# Altium PCB soldering.PcbDoc
Units mm, origin at the board's own origin, x right, y up, seen from the top; angles counter-clockwise.
Board outline 116 x 45 mm, 2 copper layers (Top Layer, Bottom Layer), stack 1.571 mm thick; 60 components, 60 nets, 205 pads, 8 vias.
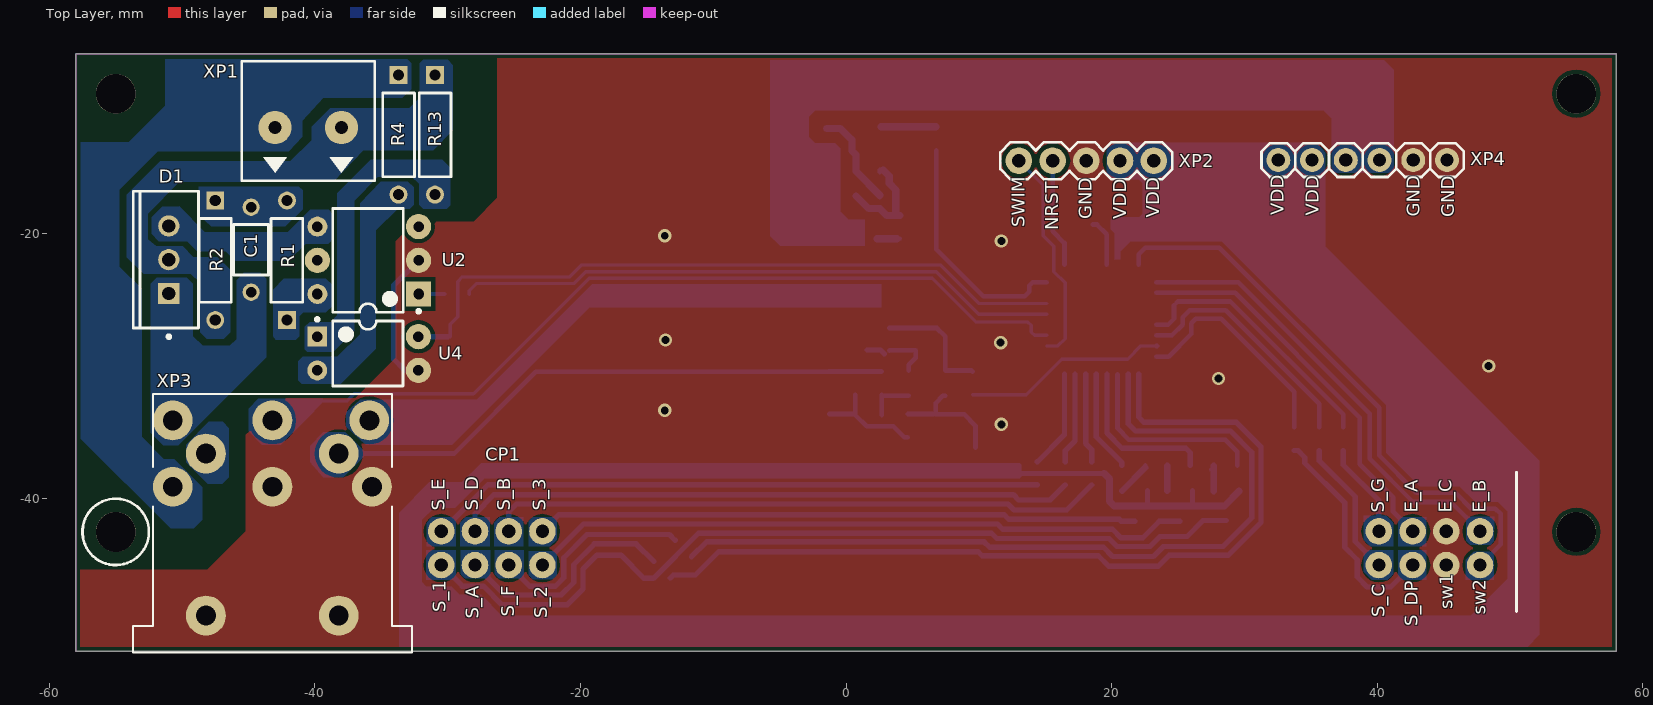
[diagram p0: Top Layer view]
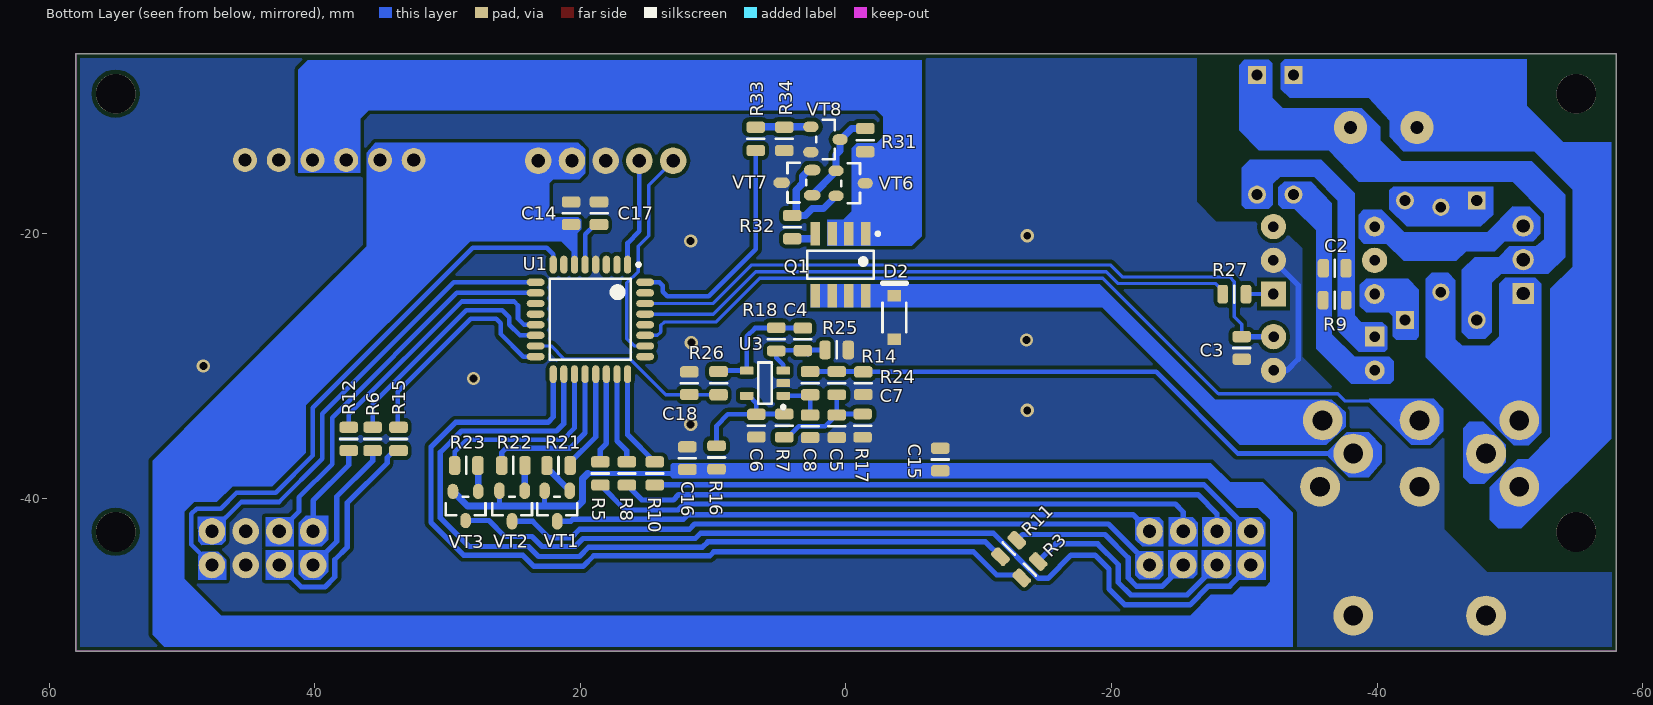
[diagram p1: Bottom Layer view, seen from below]

## Layer stack, top to bottom
Top Solder: solder mask 0.0102, Solder Resist, Dk 3.5
Top Layer: signal copper 0.0356
Dielectric1: core 1.5, FR-4, Dk 4.8
Bottom Layer: signal copper 0.0356
Bottom Solder: solder mask 0.0102, Solder Resist, Dk 3.5

## Board outline
-58,-51.5 -58,-6.5 58,-6.5 58,-51.5

## Design rules (kind name [scope] priority, off if disabled: settings)
Clearance Clearance_3 [IsRegion] p1: gap=0.3 ignorepadtopadclearanceinfootprint=FALSE except(0: Arc-Hole Track-Hole SMDPad-Hole THPad-Hole Via-Hole Fill-Hole Poly-Hole Region-Hole Text-Hole)
Clearance [All] p2: gap=0.25 ignorepadtopadclearanceinfootprint=FALSE
Clearance Clearance_2 [IsPad vs IsPad] p3: gap=0.2 ignorepadtopadclearanceinfootprint=FALSE except(0: Arc-Hole Track-Hole SMDPad-Hole THPad-Hole Via-Hole Fill-Hole Poly-Hole Region-Hole Text-Hole)
Clearance Clearance_1 [IsTrack vs IsTrack] p4: gap=0.2 ignorepadtopadclearanceinfootprint=FALSE except(0: Arc-Hole Track-Hole SMDPad-Hole THPad-Hole Via-Hole Fill-Hole Poly-Hole Region-Hole Text-Hole)
ComponentClearance [All] p1: gap=0.2 collisioncheckmode=3 verticalgap=0.2 showdistances=FALSE
HoleSize [All] p1: absolutevalues=TRUE maxlimit=40 minlimit=0.025 maxpercent=80.000 minpercent=20.000
MinimumSolderMaskSliver [All] p1: minsoldermaskwidth=0.15
PolygonConnect [All] p1: connectstyle=Direct reliefconductorwidth=0.254 reliefentries=4 polygonreliefangle="90 Angle" airgapwidth=0.254
RoutingVias [All] p1: holewidth=0.5 width=1.5 viastyle="Through Hole" minholewidth=0.2 minwidth=1 maxholewidth=2 maxwidth=3
SilkToSilkClearance [All] p1: silktosilkclearance=0.15
SilkToSolderMaskClearance SilkscreenOverComponentPads [IsPad] p1: minsilkscreentomaskgap=0.15 clearancetoexposedcopper=TRUE
SolderMaskExpansion [All] p1: expansion=0.102
Width [All] p1: maxlimit=3 minlimit=0.2 preferedwidth=1
25 further rules are at their usual default settings.

## Components (designator, comment, footprint, x,y, rotation, side; value= is the part's Value field where it differs from the comment)
C1 "A104M15X7RF5TAA" CAPA55-380X260 -44.8,-21.25 r90 top
C2 "10nF" CAP0805R -36.8,-22.65 r180 bottom
C3 "10nF" CAP0805R -29.8,-28.65 r90 bottom
C4 "10nF" CAP0805R 3.25,-28 r270 bottom
C5 "100nF" CAP0805R 0.7,-34.55 r90 bottom
C6 "100nF" CAP0805R 6.75,-34.5 r90 bottom
C7 "100nF" CAP0805R -1.3,-31.3 r90 bottom
C8 "100nF" CAP0805R 2.7,-34.55 r90 bottom
C14 "10uF" CAP0805R 20.7,-18.5 r270 bottom
C15 "10uF" CAP0805R -7.1,-37.05 r270 bottom
C16 "10uF" CAP0805R 11.95,-36.95 r270 bottom
C17 "10uF" CAP0805R 18.6,-18.5 r270 bottom
C18 "100nF" CAP0805R 11.8,-31.3 r270 bottom
CP1 "CONTROL_PANEL" CONTROL_PANEL -30.48,-45 r0 top locked
D1 "BTB12-600CW3G" ONSC-TO-220-3-221A-07 -51,-22 r180 top
D2 "MBR0540" FAIR-SOD123-2_V -3.65,-26.35 r90 bottom
Q1 "IRF7404PBF" INF-SOIC-8_V 0.415,-22.39 r270 bottom
R1 "MFR-25FBF52-1K" RESA60-630X240 -42.1,-22.05 r90 top
R2 "MFR-25FBF52-1K" RESA60-630X240 -47.5,-22.05 r270 top
R3 "22" RES0805R#1 -13.85,-45.35 r135 bottom
R4 "MFR-25FBF52-1K" RESA60-630X240 -33.7,-12.6 r270 top
R5 "22" RES0805R#1 18.5,-38.1 r90 bottom
R6 "22" RES0805R#1 35.65,-35.5 r270 bottom
R7 "10k" RES0805R#2 4.65,-34.5 r90 bottom
R8 "22" RES0805R#1 16.5,-38.1 r90 bottom
R9 "4k7" RES0805R#2 -36.8,-25.05 r180 bottom
R10 "22" RES0805R#1 14.4,-38.1 r90 bottom
R11 "22" RES0805R#1 -12.25,-43.75 r135 bottom
R12 "22" RES0805R#1 37.45,-35.5 r90 bottom
R13 "MFR-25FBF52-1K" RESA60-630X240 -30.95,-12.6 r270 top
R14 "1M" RES0805R#2 0.7,-31.3 r270 bottom
R15 "22" RES0805R#1 33.7,-35.5 r270 bottom
R16 "10" RES0805R#2 9.75,-36.9 r270 bottom
R17 "68" RES0805R#2 -1.25,-34.5 r90 bottom
R18 "100k" RES0805R#2 5.25,-28 r90 bottom
R21 "22" RES0805R#1 21.65,-37.5 r0 bottom
R22 "22" RES0805R#1 25.05,-37.5 r180 bottom
R23 "22" RES0805R#1 28.6,-37.5 r180 bottom
R24 "1k" RES0805R#1 2.7,-31.3 r270 bottom
R25 "1k" RES0805R#1 0.7,-28.8 r0 bottom
R26 "4k7" RES0805R#1 9.6,-31.3 r270 bottom
R27 "1k" RES0805R#2 -29.25,-24.6 r180 bottom
R31 "10k" RES0805R#1 -1.45,-13 r270 bottom
R32 "100" RES0805R#1 4.05,-19.55 r270 bottom
R33 "51" RES0805R#1 6.8,-12.9 r270 bottom
R34 "100k" RES0805R#1 4.65,-12.9 r90 bottom
U1 "STM8S103K3T6CTR" STM-LQFP32_L 19.25,-26.5 r270 bottom
U2 "MOC3063" LTST-DIP-6 -36,-22.05 r180 top
U3 "LMV321M5X" DBV0005A_N 6.1,-31.3 r0 bottom
U4 "VO617A-3" VISH-DIP-4 -36.01,-29.07 r0 top
VT1 "IRLML6402" SOT23#1 21.75,-40.55 r0 bottom
VT2 "IRLML6402" SOT23#1 25.15,-40.55 r0 bottom
VT3 "IRLML6402" SOT23#2 28.65,-40.55 r270 bottom
VT6 "BC847C" SOT23#2 -0.35,-16.25 r180 bottom
VT7 "BC857B" SOT23#1 3.7,-16.2 r90 bottom
VT8 "BC847C" SOT23#2 1.55,-12.95 r180 bottom
XP1 "306-021-12" 306-021-12 -40.5,-12.05 r0 top
XP2 "PLS" PLS-05 18.1,-14.55 r0 top
XP3 "KDJ01-8" KDJ01-8 -43.2,-51.6 r180 top
XP4 "PLS" PLS-06 45.26,-14.5 r180 top

## Footprints (in the part's own frame and the unit in brackets; to place one, negate y for a bottom-side part, rotate by r counter-clockwise, add the part's x,y. Pads: shape width x height; smd on the part's side, far side on the other; paste and mask are expansions set on the pad)
306-021-12 [mm]
  round 2.5 hole 1 unplated: 1(-2.5,0) 2(2.5,0)
  silkscreen extent -5,-4 5,5, body extent -5,-4 5,5, height 12.62
CAP0805R [mm] "capacitor 0805 reflow soldering"
  rrect50% 0.85x1.4 smd: 1(-0.85,0) 2(0.85,0)
  silkscreen extent 0,-0.64 0,0.64, body extent -1,-0.62 1,0.63, height 0.61
CAPA55-380X260 [mm] "THD, 2-Leads, Dia 2.6mm, Body Length 3.8mm"
  round 1.3 hole 0.8: 1(-3.2,0) 2(3.2,0)
  silkscreen extent -1.9,-1.3 1.9,1.3, body extent -1.9,-1.3 1.9,1.3, height 2.6
CONTROL_PANEL [mm]
  round 2 hole 1: 1(0,0) 2(0,2.54) 3(2.54,0) 4(2.54,2.54) 5(5.08,0) 6(5.08,2.54) 7(7.62,0) 8(7.62,2.54) 9(70.612,0) 10(70.612,2.54) 11(73.152,0) 12(73.152,2.54) 13(75.692,0) 14(75.692,2.54) 15(78.232,0) 16(78.232,2.54)
  body extent -1.4,-20.7 79.63,7.8, height 19.06
DBV0005A_N [mm] "SOT23, 5-Leads, Body 3.05x1.75mm, Pitch 0.95mm, IPC Medium Density"
  rrect17% 1x0.6 smd: 1(-1.375,0.95) 2(-1.375,0) 3(-1.375,-0.95) 4(1.375,-0.95) 5(1.375,0.95)
  silkscreen extent -1.5,-1.55 0.5,1.92, body extent -1.42,-1.46 1.42,1.46, height 1.08
FAIR-SOD123-2_V [mm] "SOD123, 2-Leads, Body 1.80x2.85mm"
  rect 0.88x1.02 smd: 1(-1.635,0) 2(1.635,0)
  silkscreen extent -1.11,-0.9 2.58,0.9, body extent -1.43,-0.9 1.42,0.9, height 1.28
INF-SOIC-8_V [mm] "SOIC, 8-Leads, Body 5x4mm, Pitch 1.27mm"
  rect 1.78x0.72 smd: 1(-2.34,1.905) 2(-2.34,0.635) 3(-2.34,-0.635) 4(-2.34,-1.905) 5(2.34,-1.905) 6(2.34,-0.635) 7(2.34,0.635) 8(2.34,1.905)
  silkscreen extent -2.46,-2.5 1.05,2.94, body extent -3,-2.5 3,2.5, height 1.75
KDJ01-8 [mm]
  round 3 hole 1.5: 1(-7.3,-17.5) 2(-7.5,-12.5) 3(-5,-15) 4(0,-12.5) 5(5,-15) 6(7.5,-12.5) 7(7.5,-17.5) 8(0,-17.5) 9(-5,-2.8) 10(5,-2.8)
  silkscreen extent -10.5,-19.5 10.5,0, body extent -10.5,-19.5 10.5,0, height 19.51
LTST-DIP-6 [mm] "DIP, 6-Leads, Body 7.8x7mm, Pitch 2.54mm"
  rect 1.9x1.9 hole 0.8: 1(-3.81,2.54)
  round 1.9 hole 0.8: 2(-3.81,0) 3(-3.81,-2.54) 5(3.81,0)
  round 1.5 hole 0.8: 4(3.81,-2.54) 6(3.81,2.54)
  silkscreen extent -3.94,-3.9 2.65,3.96, body extent -3.95,-3.9 3.95,3.9, height 5.37
ONSC-TO-220-3-221A-07 [mm] "FM, 3-Leads, Body 10.3x4.85mm, Pitch 2.54mm"
  rect 1.6x1.6 hole 1: 1(0,2.54)
  round 1.6 hole 1: 2(0,0) 3(0,-2.54)
  silkscreen extent -2.23,-5.15 2.67,5.92, body extent -2.21,-5.15 2.64,5.15, height 19.68
PLS-05 [mm]
  round 2 hole 1: 1(-5.08,0) 2(-2.54,0) 3(0,0) 4(2.54,0) 5(5.08,0)
  silkscreen extent -6.48,-1.4 6.48,1.4, body extent -6.35,-1.27 6.35,1.27, height 8.45
PLS-06 [mm]
  round 1.8 hole 1: 1(0,0) 2(2.54,0) 3(5.08,0) 4(7.62,0) 5(10.16,0) 6(12.7,0)
  silkscreen extent -1.27,-1.27 13.97,1.27, body extent -1.27,-1.27 13.97,1.27, height 8.45
RES0805R#1 [mm] "resistor 0805 reflow soldering"
  rrect50% 0.85x1.4 smd: 1(-0.875,0) 2(0.875,0)
  silkscreen extent 0,-0.64 0,0.64, body extent -1,-0.62 1,0.63, height 0.61
RES0805R#2 [mm] "resistor 0805 reflow soldering"
  rrect50% 0.8x1.4 smd: 1(-0.875,0) 2(0.875,0)
  silkscreen extent 0,-0.63 0,0.64, body extent -1,-0.62 1,0.63, height 0.61
RESA60-630X240 [mm] "Axial Resistor, 2-Leads, Dia 2.4mm, Body Length 6.3mm"
  rect 1.35x1.35 hole 0.85: 1(-4.5,0)
  round 1.35 hole 0.85: 2(4.5,0)
  silkscreen extent -3.15,-1.2 3.15,1.2, body extent -3.15,-1.2 3.15,1.2, height 2.4
SOT23#1 [mm]
  oval 0.8x1.25 smd mask+0.1: 1(-0.95,-1.15) 2(0.95,-1.15) 3(0,1.15)
  silkscreen extent -1.5,-0.7 1.5,0.7, body extent -1.46,-1.16 1.46,1.18, height 1
SOT23#2 [mm]
  oval 1.15x0.8 smd mask+0.1: 1(-1.1,0.95) 2(-1.1,-0.95) 3(1.1,0)
  silkscreen extent -0.7,-1.5 0.7,1.5, body extent -1.16,-1.46 1.18,1.46, height 1
STM-LQFP32_L [mm] "QFP, 32-Leads, Body 7x7mm, Pitch 0.8mm, IPC High Density"
  oval 1.35x0.55 smd: 1(-4.125,2.8) 2(-4.125,2) 3(-4.125,1.2) 4(-4.125,0.4) 5(-4.125,-0.4) 6(-4.125,-1.2) 7(-4.125,-2) 8(-4.125,-2.8) 17(4.125,-2.8) 18(4.125,-2) 19(4.125,-1.2) 20(4.125,-0.4) 21(4.125,0.4) 22(4.125,1.2) 23(4.125,2) 24(4.125,2.8)
  oval 0.55x1.35 smd: 9(-2.8,-4.125) 10(-2,-4.125) 11(-1.2,-4.125) 12(-0.4,-4.125) 13(0.4,-4.125) 14(1.2,-4.125) 15(2,-4.125) 16(2.8,-4.125) 25(2.8,4.125) 26(2,4.125) 27(1.2,4.125) 28(0.4,4.125) 29(-0.4,4.125) 30(-1.2,4.125) 31(-2,4.125) 32(-2.8,4.125)
  silkscreen extent -4.25,-3.05 3.05,3.75, body extent -3.5,-3.5 3.5,3.5, height 1.6
VISH-DIP-4 [mm] "DIP, 4-Leads, Body 7x4.9mm, Pitch 2.54mm"
  rect 1.5x1.5 hole 0.8: 1(-3.81,1.27)
  round 1.5 hole 0.8: 2(-3.81,-1.27)
  round 1.9 hole 0.8: 3(3.81,-1.27) 4(3.81,1.27)
  silkscreen extent -3.93,-2.45 2.65,2.69, body extent -3.95,-2.45 3.95,2.45, height 5.27

## Part data
C1: library part CMP-2000-05716-1, "Axial Leaded Multilayer Ceramic Capacitor for General Purpose, 50 VDC, 100 nF, +/- 20%, -55 to 125 degC, 2-Pin THD, RoHS, Tape and Reel", Capacitance=0.1µF, Manufacturer=Vishay, Operating Temperature=-55°C~125°C, Package / Case=Axial, Package Description="2-Pin Axial Lead, Dia 2.6 mm, Body Length 3.8 mm", Package Reference=CAPA55-380X260, Ratings=-, Standard Package=7,000, Temperature Coefficient=X7R, Tolerance=±20%, Voltage - Rated=50V, Applications=GeneralPurpose, Category=Capacitors, Datasheet URL=http://www.vishay.com/docs/45164/aseries.pdf, Datasheet Version=08/2013, Family=CeramicCapacitors, Features=-, Height - Seated (Max)=-, Lead Spacing=-, Lead Style=-, Manufacturer URL=http://www.vishay.com/, Mounting Technology=ThroughHole, Mounting Type=ThroughHole, Packaging=Tape&Reel(TR), Series=A, Size / Dimension="0.098\"Diax0.150\"L(2.50mmx3.80mm)", Thickness (Max)=-
C2 C3 C4: library part CC0805_10NF_250V_10%_X7R, Case=0805, Manufacturer=GENERIC, Manufacturer1 ComponentHeight=0.88mm, Manufacturer1 Example=KEMET, Manufacturer1 Part Number=C0805C103KARACTU, Manufacturer Part Number 2=CC0805KKX7RYBB103, Tolerance=±10%, Voltage=250V, Author="I. Kuznetsov", Component Type=Standard, CreateDate=6/24/2013, HelpURL=\\cern.ch\dfs\Applications\Altium\Datasheets\CC0805_X7R_KEMET.pdf, LatestRevisionDate=6/24/2013, Manufacturer Part Number=CC0805_10NF_250V_10%_X7R, Mounted=Yes, Part Description="SMD Multilayer Chip Ceramic Capacitor", Part Number=CC0805_10NF_250V_10%_X7R, Pin Count=2, SMD=Yes, Socket=No, Status=None, Table="Capacitors SMD", TC=X7R
C5 C6 C7 C8 C18: library part CC0805_100NF_50V_10%_X7R, "SMD 0805 Capacitor", Case=0805, Manufacturer=GENERIC, Manufacturer1 ComponentHeight=1.35mm, Manufacturer1 Example=EPCOS, Manufacturer1 Part Number=B37941K5104K62, Tolerance=±10%, Voltage=50V, Author="I. Kuznetsov", Component Type=Standard, CreateDate=03.12.2007, HelpURL=\\cern.ch\dfs\Applications\Altium\Datasheets\CC0805_X7R_EPCOS.pdf, LatestRevisionDate=03.12.2007, Manufacturer Part Number=CC0805_100NF_50V_10%_X7R, Mounted=Yes, Part Description="SMD Multilayer Chip Ceramic Capacitor", Part Number=CC0805_100NF_50V_10%_X7R, Pin Count=2, SMD=Yes, Socket=No, Status=Preferred, Table="Capacitors SMD", TC=X7R
C14 C15 C16 C17: library part CC0805_10UF_10V_10%_X7R, "SMD 0805 Capacitor", Case=0805, Manufacturer=GENERIC, Manufacturer1 ComponentHeight=1.35mm, Manufacturer1 Example=MURATA, Manufacturer1 Part Number=GRM21BR71A106KE51L, Tolerance=±10%, Voltage=10V, Author="I. Kuznetsov", Component Type=Standard, CreateDate=30.04.2012, HelpURL=\\cern.ch\dfs\Applications\Altium\Datasheets\CC0805_X7R_MURATA.pdf, LatestRevisionDate=30.04.2012, Manufacturer Part Number=CC0805_10UF_10V_10%_X7R, Mounted=Yes, Part Description="SMD Multilayer Chip Ceramic Capacitor", Part Number=CC0805_10UF_10V_10%_X7R, Pin Count=2, SMD=Yes, Socket=No, Status=Preferred, Table="Capacitors SMD", TC=X7R
D1: library part CMP-1070-00036-1, "Triacs, Silicon Bidirectional Thyristor, 3-Pin TO-220, Pb-Free, Tube", Manufacturer="On Semiconductor", ComponentLink1Description="Manufacturer URL", ComponentLink1URL=http://www.onsemi.com/, ComponentLink2Description=Datasheet, ComponentLink2URL=http://www.onsemi.com/pub_link/Collateral/BTB12-600CW3-D.PDF, ComponentLink3Description="Package Specification", ComponentLink3URL=http://www.onsemi.com/pub_link/Collateral/221A-07.PDF, DatasheetVersion="Rev. 1", IGT Max (mA)=35, IT(RMS) Max (A)=12, ITSM Max (A)=120, Mounting Technology="Through Hole", PackageDescription="3-Pin Flange Mount, Vertical Straight Lead, Body 9.97 x 4.445 mm, Pitch 2.54 mm", PackageReference=TO-220-3-221A-07, PackageVersion="Rev. O, 07/2008", Packing=Tube, PartNumber=BTB12-600CW3G, RoHS=Pb-Free
D2: library part CMP-2000-05114-1, "Schottky Rectifier, 40 V, 0.5 A, 2-Pin SOD-123, RoHS, Tape and Reel", Capacitance @ Vr, F=-, Current - Average Rectified (Io)=500mA, Current - Reverse Leakage @ Vr=20µA@40V, Manufacturer=Fairchild, Operating Temperature - Junction=-65degC~125degC, Package / Case=SOD-123, Standard Package=1, Voltage - DC Reverse (Vr) (Max)=40V, Voltage - Forward (Vf) (Max) @ If=510mV@500mA, Category=DiscreteSemiconductorProducts, Datasheet URL=https://datasheet.ciiva.com/8303/mbr0540-8303808.pdf, Datasheet Version="Rev. 1.1.0, 10/2014", Diode Type=Schottky, Family=Diodes,Rectifiers-Single, Manufacturer URL=https://www.fairchildsemi.com/, Mounting Type=SurfaceMount, Online Catalog=SchottkyDiode, Other Names=MBR0540CT, Packaging=CutTape(CT), Reverse Recovery Time (trr)=-, Series=-, Speed=FastRecovery=200mA(Io), Supplier Device Package=SOD-123
Q1: library part CMP-2000-06465-1, "HEXFET(R) Power MOSFET, 6.7 A, 20 V, 8-Pin SOIC, RoHS, Tape and Reel", Current - Continuous Drain (Id) @ 25°C=6.7A(Ta), Drain to Source Voltage (Vdss)=20V, Input Capacitance (Ciss) @ Vds=1500pF@15V, Manufacturer=InfineonTechnologies, Operating Temperature=-55°C~150°C(TJ), Package / Case="8-SOIC(0.154\",3.90mmWidth)", Package Description="8-Pin Small Outline Integrated Circuit, Body 4.9 x 3.9 mm, Pitch 1.27 mm", Package Reference=SOIC-8, Power - Max=2.5W, Supplier Device Package=8-SO, Category=DiscreteSemiconductorProducts, Datasheet URL=http://www.infineon.com/dgdl/irf7404pbf.pdf?fileId=5546d462533600a4015355fa31be1ba0, Datasheet Version=09/2004, Family=Transistors-FETs,MOSFETs-Single, FET Feature=Standard, FET Type=MOSFETP-Channel,MetalOxide, Gate Charge (Qg) @ Vgs=50nC@4.5V, Manufacturer URL=http://www.infineon.com/, Mounting Technology=SurfaceMount, Mounting Type=SurfaceMount, Packaging=Tube, Part Status=NotForNewDesigns, Rds On (Max) @ Id, Vgs=40mOhm@3.2A,4.5V, Series=HEXFET®, Vgs(th) (Max) @ Id=700mV@250µA
R1 R2 R4 R13: library part CMP-1659-00075-1, "Axial Resistor, 1 KOhm, +/- 1%, 250 mW, -55 to 155 degC, 2-Pin THD, RoHS, Bulk", Case\Package=Axial, Max Operating Temperature="155 degC", Min Operating Temperature="-55 degC", Package Quantity=200, Power Rating="250 mW", Resistance="10 kohm", Tolerance=1%, Voltage Rating="250 V", ComponentLink1Description="Manufacturer URL", ComponentLink1URL=http://www.yageo.com/, ComponentLink2Description=Datasheet, ComponentLink2URL=http://www.yageo.com/documents/recent/Yageo%20LR_MFR_2013.pdf, DatasheetVersion=Apr-13, Length="0.248 inch", PackageDescription="2-Pin Axial Lead, Dia 2.4 mm, Body Length 6.3 mm", PackageReference=MFR-25, Packaging=Bulk, RoHSCompliant=true
R3 R5 R6 R8 R10 R11 R12 R15 R21 R22 R23: library part R0805_22R_1%_0.125W_100PPM, Case=0805, Manufacturer=GENERIC, Manufacturer1 ComponentHeight=0.6mm, Manufacturer1 Example="NIC COMPONENT", Manufacturer1 Part Number=NRC10F22R0TRF, Power=0.125W, Tolerance=±1%, Author="CERN DEM JLC", Component Type=Standard, CreateDate=03.12.2007, HelpURL=\\cern.ch\dfs\Applications\Altium\Datasheets\R0805_NIC_NRC.pdf, LatestRevisionDate=13.03.2008, Manufacturer Part Number=R0805_22R_1%_0.125W_100PPM, Mounted=Yes, Part Description="General Purpose Thick Film Chip Resistor", Part Number=R0805_22R_1%_0.125W_100PPM, Pin Count=2, SMD=Yes, Socket=No, Status=Preferred, Table="Resistors SMD", TC=±100ppm/°C
R7 R31: library part R0805_10K_1%_0.125W_100PPM, Case=0805, Manufacturer=GENERIC, Manufacturer1 ComponentHeight=0.6mm, Manufacturer1 Example="NIC COMPONENT", Manufacturer1 Part Number=NRC10F1002TRF, Power=0.125W, Tolerance=±1%, Author="CERN DEM JLC", Component Type=Standard, HelpURL=\\cern.ch\dfs\Applications\Altium\Datasheets\R0805_NIC_NRC.pdf, Manufacturer Part Number=R0805_10K_1%_0.125W_100PPM, Mounted=Yes, Part Description="General Purpose Thick Film Chip Resistor", Part Number=R0805_10K_1%_0.125W_100PPM, Pin Count=2, SMD=Yes, Socket=No, Status=Preferred, Table="Resistors SMD", TC=±100ppm/°C
  R7: CreateDate=12/3/2007, LatestRevisionDate=3/13/2008, PackageDescription=Standard
  R31: CreateDate=03.12.2007, LatestRevisionDate=13.03.2008
R9 R26: library part R0805_4K7_1%_0.125W_100PPM, Case=0805, Manufacturer=GENERIC, Manufacturer1 ComponentHeight=0.6mm, Manufacturer1 Example="NIC COMPONENT", Manufacturer1 Part Number=NRC10F4701TRF, Power=0.125W, Tolerance=±1%, Author="CERN DEM JLC", Component Type=Standard, CreateDate=12/3/2007, HelpURL=\\cern.ch\dfs\Applications\Altium\Datasheets\R0805_NIC_NRC.pdf, LatestRevisionDate=3/13/2008, Manufacturer Part Number=R0805_4K7_1%_0.125W_100PPM, Mounted=Yes, PackageDescription=Standard, Part Description="General Purpose Thick Film Chip Resistor", Part Number=R0805_4K7_1%_0.125W_100PPM, Pin Count=2, SMD=Yes, Socket=No, Status=Preferred, Table="Resistors SMD", TC=±100ppm/°C
R14: library part R0805_1M_1%_0.125W_100PPM, Case=0805, Manufacturer=GENERIC, Manufacturer1 ComponentHeight=0.6mm, Manufacturer1 Example="NIC COMPONENT", Manufacturer1 Part Number=NRC10F1004TRF, Power=0.125W, Tolerance=±1%, Author="CERN DEM JLC", Component Type=Standard, CreateDate=12/3/2007, HelpURL=\\cern.ch\dfs\Applications\Altium\Datasheets\R0805_NIC_NRC.pdf, LatestRevisionDate=3/13/2008, Manufacturer Part Number=R0805_1M_1%_0.125W_100PPM, Mounted=Yes, PackageDescription=Standard, Part Description="General Purpose Thick Film Chip Resistor", Part Number=R0805_1M_1%_0.125W_100PPM, Pin Count=2, SMD=Yes, Socket=No, Status=Preferred, Table="Resistors SMD", TC=±100ppm/°C
R16: library part R0805_10R_1%_0.125W_200PPM, Case=0805, Manufacturer=GENERIC, Manufacturer1 ComponentHeight=0.6mm, Manufacturer1 Example="NIC COMPONENT", Manufacturer1 Part Number=NRC10F10R0TRF, Power=0.125W, Tolerance=±1%, Author="CERN DEM JLC", Component Type=Standard, CreateDate=12/3/2007, HelpURL=\\cern.ch\dfs\Applications\Altium\Datasheets\R0805_NIC_NRC.pdf, LatestRevisionDate=6/24/2009, Manufacturer Part Number=R0805_10R_1%_0.125W_200PPM, Mounted=Yes, PackageDescription=Standard, Part Description="General Purpose Thick Film Chip Resistor", Part Number=R0805_10R_1%_0.125W_200PPM, Pin Count=2, SMD=Yes, Socket=No, Status=Preferred, Table="Resistors SMD", TC=±200ppm/°C
R17: library part R0805_68R_1%_0.125W_100PPM, Case=0805, Manufacturer=GENERIC, Manufacturer1 ComponentHeight=0.6mm, Manufacturer1 Example="NIC COMPONENT", Manufacturer1 Part Number=NRC10F68R0TRF, Power=0.125W, Tolerance=±1%, Author="CERN DEM JLC", Component Type=Standard, CreateDate=12/3/2007, HelpURL=\\cern.ch\dfs\Applications\Altium\Datasheets\R0805_NIC_NRC.pdf, LatestRevisionDate=3/13/2008, Manufacturer Part Number=R0805_68R_1%_0.125W_100PPM, Mounted=Yes, PackageDescription=Standard, Part Description="General Purpose Thick Film Chip Resistor", Part Number=R0805_68R_1%_0.125W_100PPM, Pin Count=2, SMD=Yes, Socket=No, Status=Preferred, Table="Resistors SMD", TC=±100ppm/°C
R18 R34: library part R0805_100K_1%_0.125W_100PPM, Case=0805, Manufacturer=GENERIC, Manufacturer1 ComponentHeight=0.6mm, Manufacturer1 Example="NIC COMPONENT", Manufacturer1 Part Number=NRC10F1003TRF, Power=0.125W, Tolerance=±1%, Author="CERN DEM JLC", Component Type=Standard, HelpURL=\\cern.ch\dfs\Applications\Altium\Datasheets\R0805_NIC_NRC.pdf, Manufacturer Part Number=R0805_100K_1%_0.125W_100PPM, Mounted=Yes, Part Description="General Purpose Thick Film Chip Resistor", Part Number=R0805_100K_1%_0.125W_100PPM, Pin Count=2, SMD=Yes, Socket=No, Status=Preferred, Table="Resistors SMD", TC=±100ppm/°C
  R18: CreateDate=12/3/2007, LatestRevisionDate=3/13/2008, PackageDescription=Standard
  R34: CreateDate=03.12.2007, LatestRevisionDate=13.03.2008
R24 R25 R27: library part R0805_1K_1%_0.125W_100PPM, Case=0805, Manufacturer=GENERIC, Manufacturer1 ComponentHeight=0.6mm, Manufacturer1 Example="NIC COMPONENT", Manufacturer1 Part Number=NRC10F1001TRF, Power=0.125W, Tolerance=±1%, Author="CERN DEM JLC", Component Type=Standard, CreateDate=12/3/2007, HelpURL=\\cern.ch\dfs\Applications\Altium\Datasheets\R0805_NIC_NRC.pdf, LatestRevisionDate=3/13/2008, Manufacturer Part Number=R0805_1K_1%_0.125W_100PPM, Mounted=Yes, PackageDescription=Standard, Part Description="General Purpose Thick Film Chip Resistor", Part Number=R0805_1K_1%_0.125W_100PPM, Pin Count=2, SMD=Yes, Socket=No, Status=Preferred, Table="Resistors SMD", TC=±100ppm/°C
R32: library part R0805_100R_1%_0.125W_100PPM, Case=0805, Manufacturer=GENERIC, Manufacturer1 ComponentHeight=0.6mm, Manufacturer1 Example="NIC COMPONENT", Manufacturer1 Part Number=NRC10F4700TRF, Power=0.125W, Tolerance=±1%, Author="CERN DEM JLC", Component Type=Standard, CreateDate=03.12.2007, HelpURL=\\cern.ch\dfs\Applications\Altium\Datasheets\R0805_NIC_NRC.pdf, LatestRevisionDate=13.03.2008, Manufacturer Part Number=R0805_100R_1%_0.125W_100PPM, Mounted=Yes, Part Description="General Purpose Thick Film Chip Resistor", Part Number=R0805_100R_1%_0.125W_100PPM, Pin Count=2, SMD=Yes, Socket=No, Status=Preferred, Table="Resistors SMD", TC=±100ppm/°C
R33: library part R0805_51R_1%_0.125W_100PPM, Case=0805, Manufacturer=GENERIC, Manufacturer1 ComponentHeight=0.6mm, Manufacturer1 Example="NIC COMPONENT", Manufacturer1 Part Number=NRC10F51R0TRF, Power=0.125W, Tolerance=±1%, Author="CERN DEM JLC", Component Type=Standard, CreateDate=03.12.2007, HelpURL=\\cern.ch\dfs\Applications\Altium\Datasheets\R0805_NIC_NRC.pdf, LatestRevisionDate=13.03.2008, Manufacturer Part Number=R0805_51R_1%_0.125W_100PPM, Mounted=Yes, Part Description="General Purpose Thick Film Chip Resistor", Part Number=R0805_51R_1%_0.125W_100PPM, Pin Count=2, SMD=Yes, Socket=No, Status=Preferred, Table="Resistors SMD", TC=±100ppm/°C
U1: library part CMP-0947-00001-1, "STM8S 8-bit MCU, 8 kB Flash, 1 kB Internal RAM, -40 to 85 degC, 32-Pin LQFP, Tape and Reel", Manufacturer=STMicroelectronics, Operating Frequency="16 MHz", Supply Voltage="2.95 to 5.5 V", Temperature Range="-40 to 85 degC", ComponentLink1Description="Manufacturer URL", ComponentLink1URL=http://www.st.com/, ComponentLink2Description=Datasheet, ComponentLink2URL=http://www.st.com/st-web-ui/static/active/en/resource/technical/document/datasheet/CD00226640.pdf, Data E2PROM Nom="640 Bytes", DatasheetVersion="Rev. 9", Family Type=Standard, Internal RAM Size="1 KBytes", Mounting Technology="Surface Mount", PackageDescription="32-Pin Low Profile Quad Flat Package, Body 7 x 7 mm, Pitch 0.8 mm", PackageReference=LQFP-32, Packing="Tape and Reel", PartNumber=STM8S103K3T6CTR, Product Class=STM8, Program Memory Size="8 KBytes", Sub-family Type=103
U2: library part CMP-2000-06746-1, "Optocoupler Triac, 50 mA, -40 to 100 degC, 6-Pin DIP, RoHS, Tube", Current - DC Forward (If) (Max)=50mA, Current - Hold (Ih)=400µA(Typ), Current - LED Trigger (Ift) (Max)=5mA, Current - On State (It (RMS)) (Max)=-, Manufacturer=Lite-On-Inc., Operating Temperature=-40°C~100°C, Package / Case="6-DIP(0.300\",7.62mm)", Package Description="6-Pin Double In-line Package, Body 7.3 x 6.5 mm, Pitch 2.54 mm", Package Reference=DIP-6, Supplier Device Package=6-DIP, Voltage - Forward (Vf) (Typ)=1.2V, Voltage - Isolation=5000Vrms, Voltage - Off State=600V, Approvals=CSA,FIMKO,UL, Category=Isolators, Datasheet URL=http://optoelectronics.liteon.com/upload/download/DS70-2001-026/S_110_MOC3063%20SERIES.pdf, Datasheet Version="Rev. C, 04/2010", Family=Optoisolators-Triac,SCROutput, Manufacturer URL=http://www.us.liteon.com/, Mounting Technology=ThroughHole, Mounting Type=ThroughHole, Number of Channels=1, Output Type=Triac, Packaging=Tube, Series=-, Static dV/dt (Min)=1kV/µs, Turn On Time=-, Zero Crossing Circuit=Yes
U3: library part CMP-0055-01048-3, "General Purpose, Low Voltage, Rail-to-Rail Output Operational Amplifiers, 5-pin SOT-23", Manufacturer="Texas Instruments", Package Reference=DBV0005A, PackageTopMarking=A13*XTT, PowerWise=N, ComponentLink1Description="Datasheet URL", ComponentLink1URL=http://www.ti.com/general/docs/lit/getliterature.tsp?genericPartNumber=LMV321-N&fileType=pdf, CompType=Amplifiers, PackageDescription="Molded SOT-23, .115 x .063 x .040 in Body, 5 Lead, .0375 in Pitch", PinCount=5, RoHS=N
U4: library part CMP-2000-07400-1, "Optocoupler, Phototransistor Output, High Reliability, 5300 VRMS, -55 to 110 degC, 4-Pin DIP, RoHS, Tape and Reel", Manufacturer=Vishay/Semiconductor, Maximum Collector Current=50mA, Maximum Collector Emitter Saturation Voltage=400mV, Maximum Collector Emitter Voltage=80V, Maximum Current Transfer Ratio @ Current=200%, Maximum Forward Voltage=1.65V, Maximum Input Current=60mA, Maximum Power Dissipation=150mW, Maximum Reverse Voltage=6V, Minimum Forward Voltage=1V, Minimum Isolation Voltage=5000Vrms, Operating Temperature=-55to110°C, Package=4PDIP, Package Description="4-Pin Double In-line Package, Body 4.58 x 6.5 mm, Pitch 2.54 mm", Package Reference=DIP-4, Typical Forward Voltage=1.35V, Category=TransistorandPhotovoltaicOutputPhotoCouplers, Datasheet URL=http://www.vishay.com/docs/83430/vo617a.pdf, Datasheet Version="Rev. 2.5, 08/2015", Input Type=DC, Manufacturer URL=http://www.vishay.com/, Mounting Technology=ThroughHole, Number of Channels per Chip=1, Output Type=DC, Packaging=Tape&Reel, Rad Hard=No
VT1 VT2 VT3 VT6 VT7 VT8: Case=SOT23, Author="I. Kuznetsov", Component Type=Standard, Mounted=Yes, SMD=Yes, Socket=No, Status=Active, Table=Transistors
  VT1 VT2 VT3: Device=IRLML6402, Part Description="MOSFET P-êàíàë 20Â/3.7À/1.3Âò/0.065 Îì", Part Number=IRLML6402
  VT6 VT8: Device=BC847C, Part Description="NPN 45Â/0.1À Êóñ.=420-800", Part Number=BC847C
  VT7: Device=BC857B, Part Description="PNP 45Â/0.1À Êóñ.=200-450", Part Number=BC857B
XP2: library part PLS-05, Manufacturer=AUK, Component Type=Standard, Family=PLS, Manufacturer Part Number=PLS-05, PackageDescription=PLS-05, Part Number=PLS-05, Pin Count=5, SMD=Yes, Table=AUK
XP4: library part PLS-06, Manufacturer=AUK, ComponentLink1URL=http://lib.chipdip.ru/227/DOC000227157.pdf, Component Type=Standard, Device=PLS-06, Family=PLS, Manufacturer Part Number=PLS-06, PackageDescription=PLS-06, Part Number=PLS-06, Pin Count=6, SMD=Yes, Table=AUK
XP1: ComponentLink1URL=http://www.promelec.ru/pdf/305,306.pdf, Device=306-021-12, Family=DG306, Part Number=306-021-12, Table=DEGSON
XP3: Device=KDJ01-8, Part Number=KDJ01-8, Table=OTHER

## Free pads (board coordinates)
  round 3 hole 3 unplated: 1(-55,-42.5) 1(-55,-9.5) 1(55,-42.5) 1(55,-9.5)

## Via types
v1: diameter 1, hole 0.6, Top Layer to Bottom Layer, 8 vias

## Nets (pads, with @x,y where several pads share a name; then routed paths per layer and width w, separated by ;. In a path a pad name is that pad's centre, name@x,y a point inside that pad or via, vN(x,y) a via of type N, cw(c..) or ccw(c..) an arc to the next point about the centre after c; other vN are vias at no path point)
+24V: Q1.1 Q1.2 Q1.3 R31.2 VT6.3 XP4.3 XP4.4 | length 31.7
  Bottom Layer w0.5: -1.9,-8.7 29.75,-8.7
AC1: D1.2 R2.2 R13.1 XP1.2 | length 1.4
  Bottom Layer w0.6: -53.2,-21.35 -52.55,-22 ; R2.2@-47.5,-27 R2.2
AC2: R4.1 XP1.1 XP3.6
EARTH: XP3.5
ENC_A: CP1.12 U1.10 | length 29.4
  Bottom Layer w0.35: U1.10 29.3,-24.5 38.7,-33.9 38.7,-37.4 41.2,-39.9 41.2,-40.988 CP1.12
ENC_B: CP1.16 U1.9 | length 34.1
  Bottom Layer w0.35: U1.9 29.55,-23.7 39.45,-33.6 39.45,-37 42.7,-40.25 45.542,-40.25 CP1.16
FAN+: D2.2 Q1.5 Q1.6 Q1.7 Q1.8 XP3.1
FAN_PWM: R33.2 U1.32 | length 17.9
  Bottom Layer w0.35: R33.2 6.8,-21.2 10.35,-24.75 13.45,-24.75 13.8,-24.4 13.8,-23.95 14.05,-23.7 U1.32
GND: C3.1 C5.1 C6.1 C7.1 C8.1 C14.1 C15.1 C16.1 C17.1 C18.1 CP1.13 CP1.14 D2.1 R17.1 R25.1 R34.1 U1.4 U2.2 U3.2 U4.3 VT7.3 VT8.2 XP2.3 XP3.2 XP3.4 XP3.9 XP3.10 XP4.1 XP4.2 | length 10.4
  Bottom Layer w0.4: U4.3 -33.21,-30.34 -34.05,-29.5 -34.05,-23.91 U2.2
  other v1: 11.7,-34.4 -13.65,-33.35 28.05,-30.95 48.4,-30 11.65,-28.25 -13.6,-28.05 11.7,-20.6 -13.65,-20.2
HTR1: C1.1 D1.1 XP3.7 | length 0.4
  Bottom Layer w0.6: -51,-26.65 -50.7,-26.95
NetC1_2: C1.2 R1.2 R2.1
NetC2_1: C2.1 R4.2 R9.1 U4.2 | length 2.4
  Bottom Layer w0.6: U4.2@-39.985,-30.175 U4.2 -39.28,-29.8 -37.85,-29.8
NetC2_2: C2.2 R9.2 R13.2 U4.1 | length 4.9
  Bottom Layer w0.6: U4.1@-40.445,-28.425 U4.1 -38.15,-27.8 ; -35.4,-15.25 -33.1,-15.25
NetC4_1: C4.1 R18.2 R26.1 U3.4 | length 9.2
  Bottom Layer w0.35: C4.1 6.85,-27.15 7.475,-27.775 U3.4 9.475,-30.35 R26.1@9.55,-30.425
NetC4_2: C4.2 R18.1 R25.2 U3.3 | length 5.2
  Bottom Layer w0.35: C4.2 3.275,-28.825 5.25,-28.825 R18.1 5.25,-29.4 4.725,-29.925 U3.3
  Bottom Layer w0.4: R25.2 2.6,-28.8 C4.2@2.875,-29.075
NetC5_2: C5.2 R7.1 R14.2 R17.2 | length 8
  Bottom Layer w0.35: R17.2 0.625,-33.625 0.7,-33.55 R14.2 ; C5.2 1.55,-34.55 3.55,-34.55 4.375,-35.375 R7.1
NetC6_2: C6.2 R7.2 R16.1 U3.5 | length 8.8
  Bottom Layer w0.35: R7.2 6.6,-33.625 C6.2@6.6,-33.65 ; C6.2 8.9,-33.65 9.75,-34.5 R16.1 R16.1@9.75,-36.175 ; C6.2@6.75,-33.625 6.75,-32.8 7.3,-32.25 U3.5
NetC8_2: C8.2 R24.2 U3.1 | length 3.6
  Bottom Layer w0.35: C8.2 R24.2 2.775,-32.25 U3.1
NetCP1_2: CP1.2 R10.1 | length 46.3
  Bottom Layer w0.4: CP1.2 -30.46,-42.46 -26.95,-38.95 -24.9,-38.95 R10.1@14.4,-38.95
NetCP1_3: CP1.3 R3.2 | length 17.3
  Bottom Layer w0.4: CP1.3 -25.69,-47.25 -21.45,-47.25 -20.5,-46.3 -20.5,-44.95 -18.95,-43.4 -15.8,-43.4 R3.2
NetCP1_4: CP1.4 R8.1 | length 47
  Bottom Layer w0.4: CP1.4 -27.94,-41.14 -26.5,-39.7 12.6,-39.7 13,-40.1 15.375,-40.1 R8.1
NetCP1_5: CP1.5 R11.2 | length 15.9
  Bottom Layer w0.4: CP1.5 -23.8,-46.6 -21.9,-46.6 -21.25,-45.95 -21.25,-44.45 -19.5,-42.7 -13.3,-42.7 R11.2
NetCP1_6: CP1.6 R5.1 | length 46.6
  Bottom Layer w0.4: CP1.6 -25.4,-41 -24.8,-40.4 12.2,-40.4 12.65,-40.85 16.625,-40.85 R5.1
NetCP1_9: CP1.9 R6.2 | length 10.5
  Bottom Layer w0.4: R6.2 35.65,-37.15 38.35,-39.85 38.35,-43.218 CP1.9
NetCP1_10: CP1.10 R12.1 | length 7.2
  Bottom Layer w0.4: R12.1 37.45,-37.45 40.132,-40.132 CP1.10
NetCP1_11: CP1.11 R15.2 | length 16.8
  Bottom Layer w0.4: R15.2@33.75,-36.375 34.025,-36.375 34.55,-36.9 34.55,-37.3 37.55,-40.3 37.55,-43.65 38.5,-44.6 38.5,-45.9 39.25,-46.65 41.022,-46.65 CP1.11
NetD1_3: D1.3 U2.4
NetQ1_4: Q1.4 R32.2 | length 1.9
  Bottom Layer w0.35: R32.2@3.825,-20.425 R32.2 R32.2@3.825,-20.425
  Bottom Layer w0.55: Q1.4@2.35,-20.425 R32.2@3.825,-20.425
NetR1_1: R1.1 U2.6
NetR21_2: R21.2 VT1.1 | length 2.6
  Bottom Layer w0.35: R21.2@22.525,-37.675 R21.2
  Bottom Layer w0.5: VT1.1 R21.2@22.525,-37.675
NetR22_2: R22.2 VT2.1 | length 1.9
  Bottom Layer w0.4: R22.2 R22.2@24.2,-37.525
  Bottom Layer w0.5: VT2.1 R22.2@24.2,-37.525
NetR23_2: R23.2 VT3.1 | length 2
  Bottom Layer w0.35: R23.2@27.5,-37.825 R23.2@27.525,-37.8 ; R23.2@27.7,-37.525 R23.2
  Bottom Layer w0.5: VT3.1 R23.2@27.7,-37.525
NetR27_2: R27.2 U2.1 | length 2
  Bottom Layer w0.3: U2.1 -30.235,-24.59 R27.2@-30.225,-24.6
NetR31_1: R31.1 VT6.1 VT7.1 VT8.3 | length 7.5
  Bottom Layer w0.35: VT6.1@0.7,-15.35 VT6.1@0.75,-15.4 ; VT6.1@0.75,-15.35 VT6.1 ; VT7.1@2.55,-17.3 VT7.1@2.55,-17.2
  Bottom Layer w0.55: R31.1 -0.425,-12.125 0.4,-12.95 VT8.3 0.45,-13.8 0.75,-14.1 VT6.1 ; VT6.1@0.75,-15.35 VT7.1
NetR32_1: R32.1 VT6.2 VT7.2 | length 8.1
  Bottom Layer w0.35: VT7.2 VT7.2@2.8,-15.25 ; R32.1@3.75,-18.375 R32.1
  Bottom Layer w0.55: VT6.2 1.7,-18.15 2.55,-18.15 3.075,-18.675 R32.1 ; VT7.2@2.8,-15.25 3.25,-15.7 3.25,-16.25 3.75,-16.75 R32.1@3.75,-18.375
NetR33_1: R33.1 R34.2 VT8.1 | length 4.2
  Bottom Layer w0.35: R33.1@6.775,-12 R33.1
  Bottom Layer w0.55: VT8.1 R33.1@6.775,-12
NRST: U1.1 XP2.2 | length 8.2
  Bottom Layer w0.35: XP2.2 15.56,-19.86 16.45,-20.75 U1.1
PWR_SEG1: CP1.1 VT3.3 | length 66.2
  Bottom Layer w0.4: CP1.1 -28.89,-46.59 -27.31,-46.59 -25.9,-48 -21,-48 -19.8,-46.8 -19.8,-45.3 -18.75,-44.25 -16.95,-44.25 -15.2,-46 -14.5,-46 -11.1,-42.6 10.95,-42.6 11.35,-43 19.8,-43 20.4,-43.6 22.9,-43.6 23.65,-42.85 25.7,-42.85 26.9,-41.65 VT3.3
PWR_SEG2: CP1.7 VT2.3 | length 50.2
  Bottom Layer w0.4: CP1.7 -19.76,-41.9 11.4,-41.9 11.8,-42.3 20.075,-42.3 20.725,-42.95 22.35,-42.95 23.6,-41.7 VT2.3
PWR_SEG3: CP1.8 VT1.3 | length 45.3
  Bottom Layer w0.4: CP1.8 -21.6,-41.2 11.9,-41.2 12.25,-41.55 20.575,-41.55 20.725,-41.7 VT1.3
REED: U1.27 XP3.8 | length 64.8
  Bottom Layer w0.25: XP3.8 -41.75,-32.65 -37.6,-32.65 -37.05,-32.1 -28.05,-32.1 -19.35,-23.4 6.5,-23.4 9.8,-26.7 13.7,-26.7 13.95,-26.95 13.95,-27.45 14.2,-27.7 U1.27
SEG1: R23.1 U1.19 | length 14.9
  Bottom Layer w0.35: U1.19 20.45,-34.7 21.3,-35.55 28.575,-35.55 29.475,-36.45 R23.1
SEG2: R22.1 U1.20 | length 12.3
  Bottom Layer w0.4: U1.20 19.65,-35.05 20.8,-36.2 25.6,-36.2 25.925,-36.525 R22.1
SEG3: R21.1 U1.21 | length 7.7
  Bottom Layer w0.4: U1.21 18.85,-35.35 20.775,-37.275 R21.1
SEG_A: R3.1 U1.17 | length 66.2
  Bottom Layer w0.4: R3.1 -13.013,-45.75 -11.35,-45.75 -9.6,-44 9.95,-44 10.25,-44.3 19,-44.3 19.8,-45.1 23.5,-45.1 24.35,-44.25 28.8,-44.25 31.25,-41.8 31.25,-36.1 29.4,-34.25 22.45,-34.25 22.05,-33.85 U1.17
SEG_B: R5.2 U1.22 | length 6.8
  Bottom Layer w0.4: U1.22 18.05,-35.85 18.5,-36.3 R5.2
SEG_C: R6.1 U1.14 | length 18.1
  Bottom Layer w0.35: U1.14 24.55,-27.7 25.35,-26.9 25.35,-26.35 25.9,-25.8 28.6,-25.8 35.65,-32.85 R6.1
SEG_D: R8.2 U1.23 | length 6.9
  Bottom Layer w0.4: R8.2 16.5,-36.4 17.25,-35.65 U1.23
SEG_DP: R15.1 U1.16 | length 17
  Bottom Layer w0.35: U1.16 24.3,-29.3 26,-27.6 26,-26.8 26.35,-26.45 28.25,-26.45 33.75,-31.95 R15.1@33.75,-34.625
SEG_E: R10.2 U1.24 | length 7.4
  Bottom Layer w0.4: R10.2 16.45,-35.175 U1.24
SEG_F: R11.1 U1.18 | length 63.2
  Bottom Layer w0.4: R11.1 -10.513,-43.25 10.4,-43.25 10.8,-43.65 19.375,-43.65 20.075,-44.35 23.15,-44.35 23.9,-43.6 28.4,-43.6 30.55,-41.45 30.55,-36.5 28.95,-34.9 21.8,-34.9 21.25,-34.35 U1.18
SEG_G: R12.2 U1.13 | length 19.9
  Bottom Layer w0.35: U1.13 24.25,-26.9 24.7,-26.45 24.7,-25.45 25,-25.15 28.95,-25.15 37.45,-33.65 R12.2
SW1: CP1.15 U1.8 | length 43.1
  Bottom Layer w0.35: U1.8 22.05,-21.6 22.55,-21.1 28.1,-21.1 40.15,-33.15 40.15,-36.75 42.95,-39.55 45.9,-39.55 47.1,-40.75 48.9,-40.75 49.3,-41.15 49.3,-43.452 CP1.15
SWIM: U1.26 XP2.1 | length 16.4
  Bottom Layer w0.25: XP2.1 14.85,-16.38 14.85,-20.2 15.65,-21 15.65,-22.9 16.5,-23.75 16.5,-27.95 15.95,-28.5 U1.26
TC+: C7.2 R14.1 R24.1 XP3.3 | length 43.5
  Bottom Layer w0.35: XP3.3 -29.5,-36.6 -23.35,-30.45 C7.2 -1.275,-30.425 R14.1 R24.1
TEMP_IN: C18.2 R26.2 U1.15 | length 15.4
  Bottom Layer w0.25: R26.2@9.55,-32.175 13.575,-32.175 16.25,-29.5 21.2,-29.5 22.2,-28.5 U1.15
  Bottom Layer w0.35: U1.15 U1.15@23.425,-28.5
TRIAC: R27.1 U1.29 | length 45.7
  Bottom Layer w0.25: R27.1 -28.375,-24.325 -27.85,-23.8 -20.5,-23.8 -19.6,-22.9 6.8,-22.9 10,-26.1 U1.29
VCAP: C17.2 U1.5 | length 3.6
  Bottom Layer w0.35: C17.2 18.9,-19.35 19.65,-20.1 U1.5
VDD: C14.2 C15.2 C16.2 R16.2 U1.6 VT1.2 VT2.2 VT3.2 XP2.4 XP2.5 XP4.5 XP4.6 | length 67
  Bottom Layer w0.4: 12.85,-38.1 19.45,-38.1 ; C14.2@20.45,-19.5 20.6,-19.35 C14.2 21.65,-19.35 22.48,-20.18 23.18,-20.18 ; XP2.4 XP2.5 ; 22.7,-40.45 VT1.2 ; 26.1,-40.4 VT2.2 ; XP4.5 XP4.6 23.23,-14.5 XP2.5 ; 40.675,-32.125 28.73,-20.18 23.18,-20.18 ; 23.18,-20.18 XP2.5
  Bottom Layer w0.55: 19.45,-38.1 19.85,-38.5 19.85,-40.2 20.2,-40.55 28.5,-40.55 VT3.2
ZC: C3.2 U1.30 U4.4 | length 52.7
  Bottom Layer w0.25: C3.2 -29.8,-26.85 -29.25,-26.3 -29.25,-23.65 -28.9,-23.3 -20.8,-23.3 -19.9,-22.4 7.1,-22.4 10,-25.3 U1.30
  Bottom Layer w0.4: U4.4 C3.2@-30,-27.8
pads on no net: U1.2 U1.3 U1.7 U1.11 U1.12 U1.25 U1.28 U1.31 U2.3 U2.5

## Polygon pours and split planes (outlines as drawn)
GND on Bottom Layer "GND" (solid, remove dead copper, pour order 0): -26.4,-4.9 -26.4,-17.65 -27.9,-19.15 -32.35,-19.15 -34.35,-21.15 -34.35,-29.3 -38,-32.95 -44.2,-32.95 -45.05,-33.8 -45.05,-42.3 -48.3,-45.55 -59.15,-45.55 -59.15,-52.75 -56.75,-55.15 59.35,-55.15 59.35,-6.35 57.9,-4.9
GND on Top Layer "GND" (solid, remove dead copper, pour order 2): -23.85,-3.9 57.95,-4.25 61,-7.3 61,-52.45 56.35,-57.1 -55.1,-57.1 -60.05,-52.15 -60.05,-46.75 -58.65,-45.35 -48.1,-45.35 -45.2,-42.45 -45.2,-35.2 -42.45,-32.45 -36.95,-32.45 -33.9,-29.4 -33.9,-20.6 -32.45,-19.15 -28.05,-19.15 -26.25,-17.35 -26.25,-6.3 -27.75,-4.8

## Keep-outs
Keep-Out Layer:
  the board outline again, w0.05

## Other copper
Bottom Layer:
  region net EARTH: -47.975,-34.225 -49.7,-35.95 -49.7,-37.25 -48.075,-38.875 -46.963,-38.875 -46.488,-38.4 -46.488,-34.687 -46.95,-34.225
  region net REED: -44.25,-32.487 -44.984,-33.221 -44.984,-34.94 -43.995,-35.93 -42.58,-35.93 -40.7,-34.05 -39.4,-32.75 -39.4,-32.487
  region net TC+: -37.7,-35 -39.35,-35 -40.35,-36 -40.35,-37.25 -39.35,-38.4 -37.85,-38.4 -36.3,-36.85 -36.3,-36.4
  region net FAN+: 2.65,-23.85 -19.1,-23.85 -27.8,-32.55 -36.6,-32.55 -37.646,-33.5 -37.646,-34.6 -36.15,-35.937 -29.637,-35.937 -19.3,-25.6 2.65,-25.6
  region net VDD: 20.25,-22 20.25,-20 19.95,-19.7 19.95,-19 20.15,-18.8 22.1,-18.8 22.35,-18.55 22.35,-16.25 22.05,-15.95 20.1,-15.95 19.65,-15.5 19.65,-13.7 20.15,-13.2 35.45,-13.2 36.1,-13.95 36.1,-15.95 36.1,-17.8 36.1,-21 40.5,-25.4 47.45,-32.35 52.225,-37.125 52.225,-50.25 51.325,-51.15 -32.6,-51.15 -33.662,-51.15 -33.662,-41.063 -31.375,-38.775 -28.925,-38.775 -27.475,-37.325 13.1,-37.325 13.2,-37.45 13.2,-38.35 13.1,-38.45 -18.95,-38.45 -22.8,-38.45 -24.65,-38.45 -27.2,-38.45 -29.425,-40.675 -31.025,-40.675 -31.95,-41.6 -31.95,-46.25 -31.6,-46.65 -29.7,-46.65 -29.1,-47.25 -27.475,-47.25 -25.925,-48.8 47.05,-48.8 49.825,-46.025 49.825,-40.975 49.1,-40.25 47.4,-40.25 46.2,-39.05 43.2,-39.05 40.675,-36.525 40.675,-32.975 28.3,-20.6 21.45,-20.6 20.65,-21.4 20.65,-21.95
  region net +24V: -2.3,-13.25 -0.8,-13.25 -0.45,-13.6 -0.45,-18.35 -0.15,-18.65 0.2,-19 1.4,-19 1.4,-20.95 -2.8,-20.95 -4.95,-20.95 -5.15,-20.75 -5.7,-20.25 -5.7,-7 40.55,-7 41.25,-7.7 41.25,-15.45 36.6,-15.45 36.6,-11.4 35.95,-10.75 -2.3,-10.75 -2.8,-11.25 -2.8,-12.75
  region net NetC2_2: -29.8,-15.075 -30.4,-14.475 -35.775,-14.475 -38.3,-17 -38.3,-26.2 -38.8,-26.7 -40.4,-26.7 -40.75,-27.05 -40.75,-28.75 -40.575,-28.925 -38.625,-28.925 -37.05,-27.35 -37.05,-17.55 -35.25,-15.75 -32.7,-15.75 -32.15,-16.3 -32.15,-17.85 -31.85,-18.15 -30.05,-18.15 -29.8,-17.9
  region net NetC2_1: -35.025,-16.125 -36.6,-17.75 -36.6,-27.6 -38.325,-29.325 -40.925,-29.325 -41.25,-29.65 -41.25,-31.1 -41,-31.35 -38.05,-31.35 -35.4,-28.7 -35.4,-19.8 -33.75,-18.15 -32.863,-18.15 -32.563,-17.85 -32.563,-16.563 -33,-16.125
  region net NetR1_1: -42.325,-23.425 -43.15,-24.25 -43.15,-27.75 -42.95,-28.013 -41.438,-28.013 -41.175,-27.75 -41.175,-26.275 -40.875,-25.975 -39.175,-25.975 -38.7,-25.5 -38.7,-23.9 -39.175,-23.425
  region net AC2: -33.05,-6.9 -32.75,-7.2 -32.75,-9.15 -33.4,-9.8 -39.35,-9.8 -40.95,-11.55 -40.95,-12.75 -41.95,-13.85 -51.85,-13.85 -54.725,-16.725 -54.725,-22.525 -53.05,-24.2 -53.05,-35.35 -51.375,-37.025 -50.575,-37.025 -48.466,-39.134 -48.466,-41.584 -49.125,-42.244 -50.844,-42.244 -57.619,-35.469 -57.619,-13.15 -54,-13.15 -51.25,-10.4 -51.25,-6.9 -41.55,-6.9
  region net AC1: -46.875,-27.95 -48.15,-27.95 -48.65,-27.45 -48.65,-23.75 -49.35,-23.05 -52.9,-23.05 -54.15,-21.8 -54.15,-17.1 -51.65,-14.6 -41.85,-14.6 -40.25,-13 -40.25,-12 -38.85,-10.6 -32.9,-10.6 -32.1,-9.8 -32.1,-7.2 -31.85,-6.95 -30,-6.95 -29.6,-7.35 -29.6,-12.25 -31.1,-13.75 -36.35,-13.75 -38.6,-16.15 -50.2,-16.15 -52.6,-18.55 -52.6,-20.45 -51.95,-21 -49.95,-21 -49.15,-21.8 -47.35,-21.8 -46.375,-22.775 -46.375,-27.45
  region net HTR1: -45.35,-23 -45.9,-23.55 -45.9,-28 -46.4,-28.5 -48.45,-28.5 -49.2,-27.75 -49.2,-23.8 -49.65,-23.35 -51.9,-23.35 -52.35,-23.8 -52.35,-35.025 -51.4,-35.975 -50.3,-35.975 -43.65,-29.35 -43.65,-23.45 -44.1,-23
  region net NetD1_3: -50.225,-17.975 -48.275,-19.925 -42.025,-19.925 -40.35,-18.25 -38.95,-18.25 -38.6,-18.6 -38.6,-20.4 -39,-20.8 -40.7,-20.8 -42,-22.1 -45.95,-22.1 -46.7,-21.35 -48.85,-21.35 -49.6,-20.6 -51.75,-20.6 -52.3,-20.05 -52.3,-18.8 -51.5,-18
  region net NetC1_2: -48.75,-16.5 -41.2,-16.5 -40.925,-16.775 -40.925,-18.2 -42.225,-19.5 -47.8,-19.5 -48.75,-18.6
  region net NetCP1_6: -24.3,-43.6 -26.5,-43.6 -26.5,-41.8 -26.1,-41.4 -24.3,-41.4
  region net NetCP1_4: -26.84,-43.6 -29.04,-43.6 -29.04,-41.8 -28.64,-41.4 -26.84,-41.4
  region net NetCP1_2: -29.38,-43.6 -31.58,-43.6 -31.58,-41.8 -31.18,-41.4 -29.38,-41.4
  region net PWR_SEG1: -29.4,-46.1 -31.6,-46.1 -31.6,-43.9 -29.4,-43.9
  region net NetCP1_3: -26.8,-46 -28.7,-46 -29,-45.7 -29,-43.9 -26.8,-43.9
  region net NetCP1_5: -24.26,-46 -26.16,-46 -26.46,-45.7 -26.46,-43.9 -24.26,-43.9
  region net PWR_SEG2: -23.9,-43.95 -23.9,-45.75 -23.6,-46.05 -22.1,-46.05 -21.8,-45.75 -21.8,-44.25 -22.1,-43.95
  region net PWR_SEG3: -21.8,-41.4 -23.6,-41.4 -23.9,-41.7 -23.9,-43.6 -22.3,-43.6 -21.8,-43.1
  region net ENC_A: 41.6,-43.6 43.7,-43.6 43.7,-41.4 41.6,-41.4
  region net NetCP1_10: 39.5,-43.6 41.2,-43.6 41.2,-41.8 40.7,-41.3 39,-41.3 39,-43.1
  region net NetCP1_9: 39,-45.5 39.6,-46.1 40.8,-46.1 41.2,-45.7 41.2,-43.9 39,-43.9
  region net NetCP1_11: 41.6,-46.1 43.712,-46.1 43.7,-44.3 43.7,-43.9 41.6,-43.9
  region net SW1: 46.692,-46.1 48.792,-46.1 48.792,-44.3 48.492,-44 47.292,-44 46.692,-44.6
  region net ENC_B: 48.812,-41.36 46.712,-41.36 46.712,-43.16 47.012,-43.46 48.5,-43.5 48.8,-43.2

## Silkscreen, mask and mechanical layers (free items; w line width, h text height)
Top Overlay:
  circle w0.2: c-55,-42.5 r2.5
  lines w0.2: 50.5,-48.5 50.5,-38
  text "VDD" at 32.95,-18.65 h1 r90
  text "VDD" at 35.6,-18.7 h1 r90
  text "GND" at 43.2,-18.75 h1 r90
  text "GND" at 45.8,-18.8 h1 r90
  text "VDD" at 23.6,-18.85 h1 r90
  text "GND" at 18.5,-18.95 h1 r90
  text "VDD" at 21.1,-18.95 h1 r90
  text "SWIM" at 13.45,-19.55 h1 r90
  text "NRST" at 16,-19.8 h1 r90

## Text inside footprints (layer, text, board x,y; h text height)
CP1: Top Overlay "S_2" at -22.503,-48.994 h1 r90; Top Overlay "S_F" at -24.999,-48.9 h1 r90; Top Overlay "S_A" at -27.645,-49.039 h1 r90; Top Overlay "S_1" at -30.128,-48.555 h1 r90; Top Overlay "S_3" at -22.608,-40.896 h1 r90; Top Overlay "S_B" at -25.275,-40.896 h1 r90; Top Overlay "S_D" at -27.688,-40.896 h1 r90; Top Overlay "S_E" at -30.228,-40.896 h1 r90; Top Overlay "S_C" at 40.578,-48.913 h1 r90; Top Overlay "S_G" at 40.542,-41.052 h1 r90; Top Overlay "E_A" at 43.075,-41.052 h1 r90; Top Overlay "E_C" at 45.604,-41.068 h1 r90; Top Overlay "E_B" at 48.184,-41.052 h1 r90; Top Overlay "sw2" at 48.191,-48.745 h1 r90; Top Overlay "sw1" at 45.697,-48.345 h1 r90; Top Overlay "S_DP" at 43.075,-49.626 h1 r90